# Altium PCB FIT_PM_Dual_Range_AFE.PcbDoc (part 8 of 17)
Units mm, origin at the board's own origin, x right, y up, seen from the top; angles counter-clockwise.
Board outline 259 x 114 mm, 8 copper layers (Top Layer, Mid-Layer 1, Mid-Layer 2, Layer 1, Layer 2, Mid-Layer 3, Mid-Layer 4, Bottom Layer), stack 1.616 mm thick; 963 components, 806 nets, 4757 pads, 2208 vias.
Unrouted connection lines stored in the file: 682.
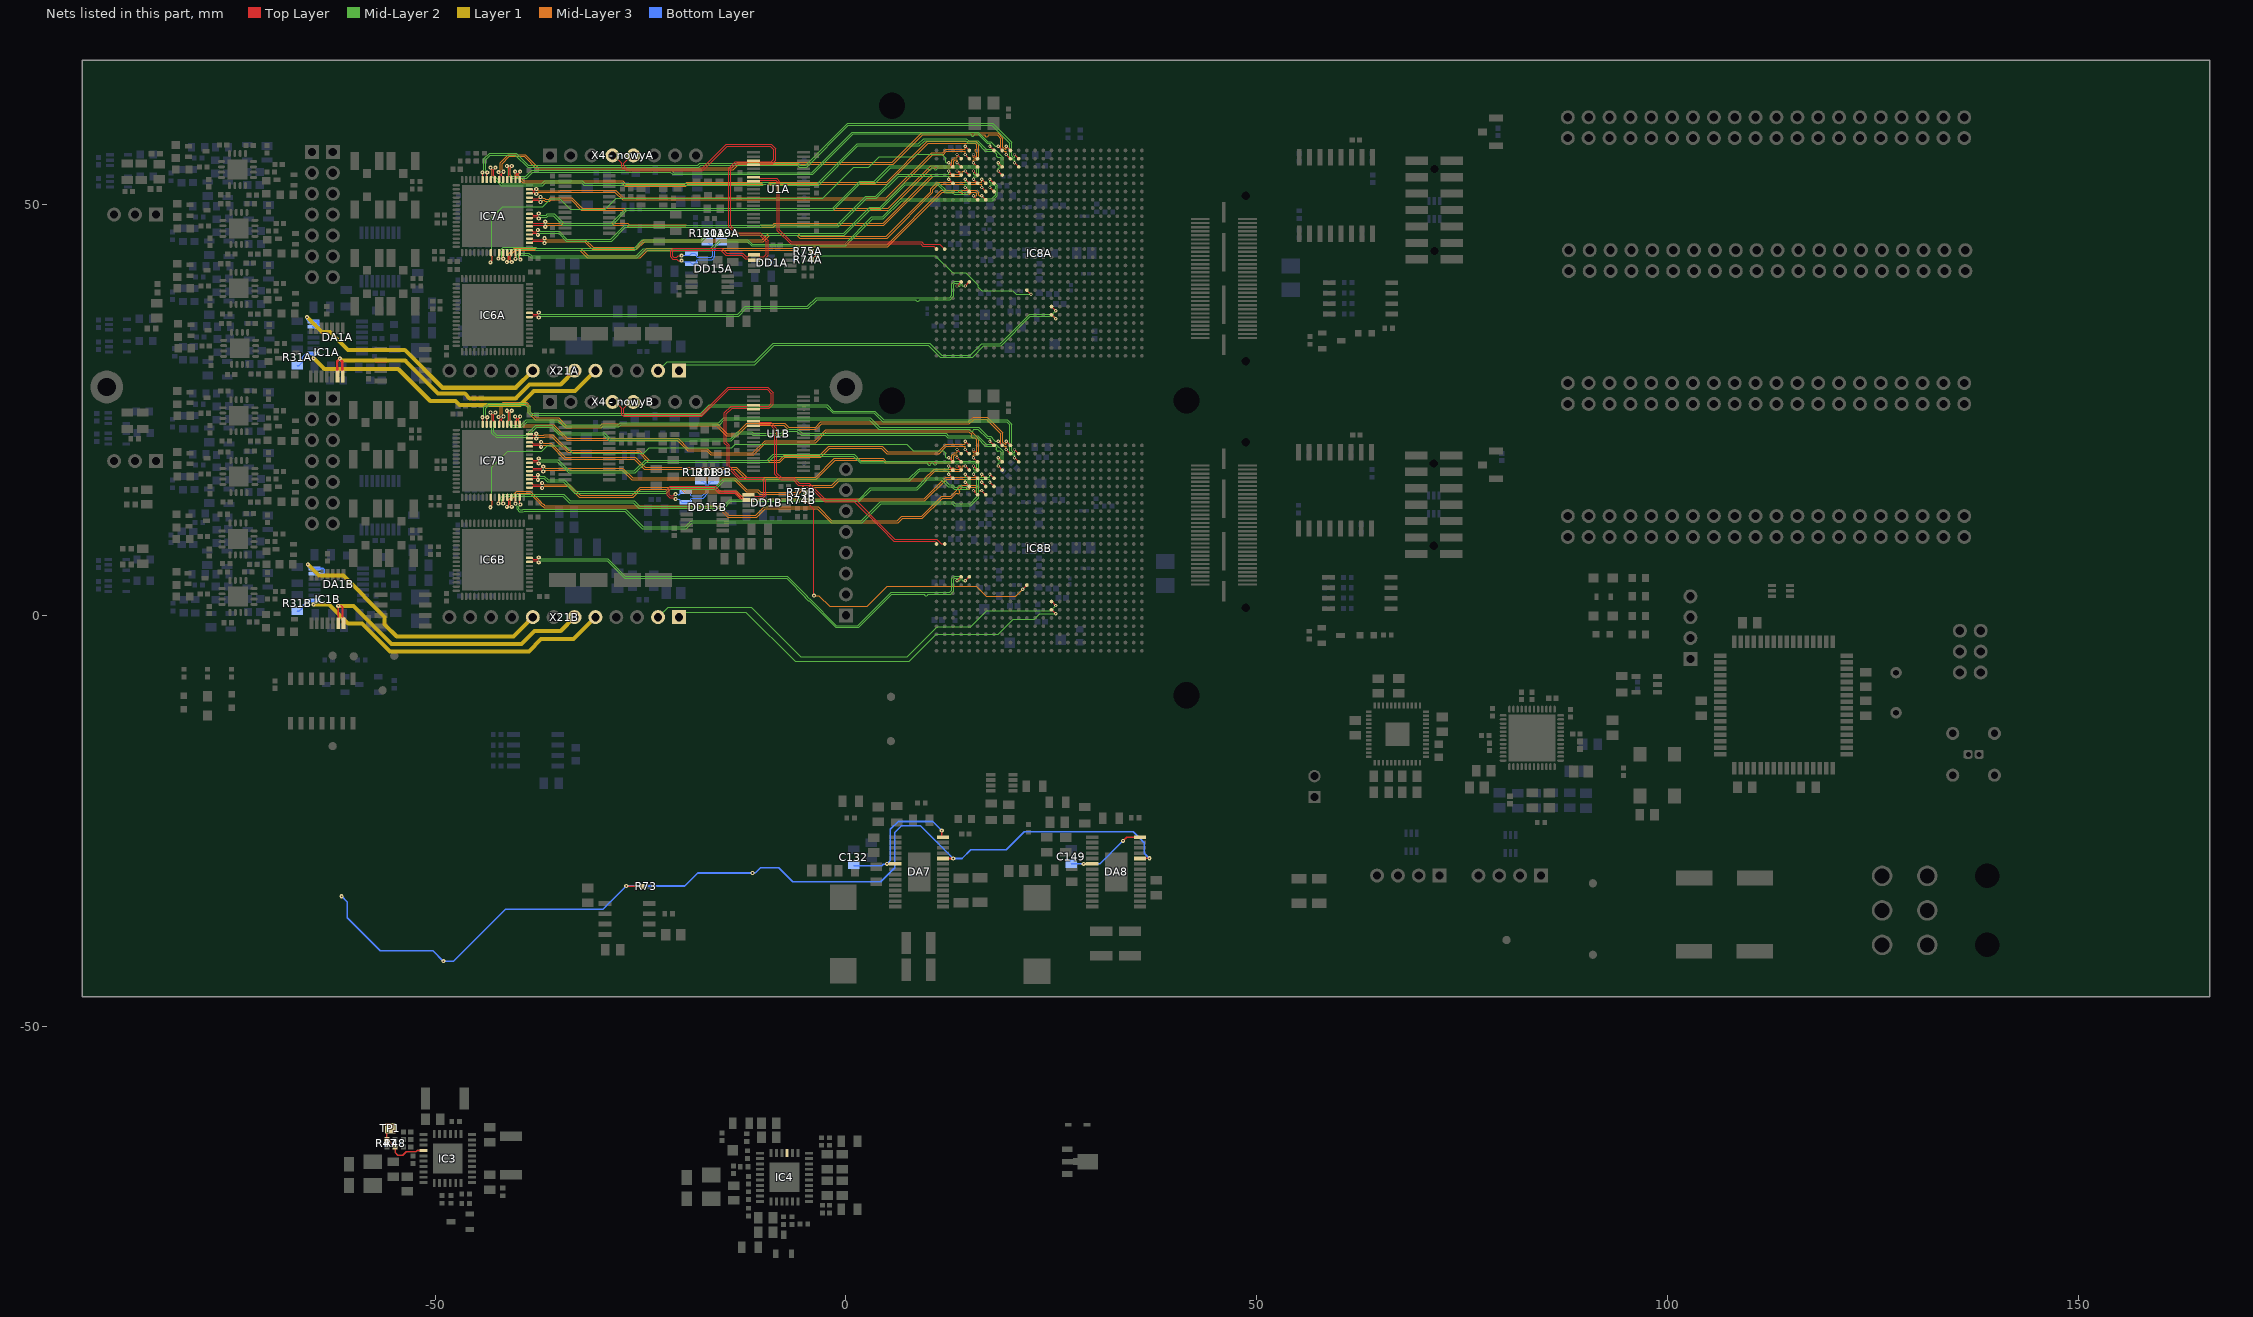
[diagram p10: the nets of this part, all layers, seen from the top]

## Via types
v1: diameter 0.5, hole 0.2, Top Layer to Bottom Layer, tented both sides, 1234 vias
v2: diameter 0.4, hole 0.2, Top Layer to Bottom Layer, tented both sides, 876 vias
v3: diameter 1, hole 0.6, Top Layer to Bottom Layer, tented both sides, 74 vias
v4: diameter 0.8, hole 0.4, Top Layer to Bottom Layer, tented both sides, 15 vias
v5: diameter 0.5, hole 0.2, Top Layer to Bottom Layer, 9 vias

## Nets (pads, with @x,y where several pads share a name; then routed paths per layer and width w, separated by ;. In a path a pad name is that pad's centre, name@x,y a point inside that pad or via, vN(x,y) a via of type N, cw(c..) or ccw(c..) an arc to the next point about the centre after c; other vN are vias at no path point) (continued)
ADCBA_D0_P1: IC7A.40 IC8A.AD24 | length 68.2
  Top Layer w0.1: v1(-43.285,42.96) -43.285,43.045 -43.08,43.25 -43.08,43.579 -43.077,43.582 -43.077,43.697 -43.227,43.847 IC7A.40@-43.227,44.156
  Top Layer w0.145: v2(12.519,55.086) IC8A.AD24@13.019,54.586
  Mid-Layer 2 w0.1: v1(-43.285,42.96) -43.285,43.039 -43.106,43.219 -43.106,48.434 -41.799,49.74 -36.898,49.74 -35.906,50.733 -34.833,50.733 -33.54,49.44 -29.29,49.44 -27.982,50.748 -2.835,50.748 0.95,54.533 2.787,54.533 4.08,55.826 8.32,55.826 8.592,56.098 11.679,56.098 12.139,55.638 12.139,55.144 12.198,55.086 v2(12.519,55.086)
ADCBA_D0_P2: IC7B.40 IC8B.AD24 | length 65.5
  Top Layer w0.1: v1(-43.285,13.16) -43.285,13.245 -43.08,13.45 -43.08,13.779 -43.077,13.782 -43.077,13.897 -43.227,14.047 IC7B.40@-43.227,14.356
  Top Layer w0.145: v2(12.519,19.186) IC8B.AD24@13.019,18.686
  Mid-Layer 2 w0.1: v1(-43.285,13.16) -43.285,13.239 -43.106,13.419 -43.106,18.034 -41.139,20 -37.039,20 -36.369,20.67 -34.17,20.67 -33.24,19.74 -24.641,19.74 -23.97,20.41 -13.899,20.41 -13.47,20.84 7.406,20.84 8.19,20.056 11.821,20.056 12.139,19.738 12.139,19.244 12.198,19.186 v2(12.519,19.186)
ADCBA_D2_N1: IC7A.43 IC8A.AB22 | length 65.6
  Top Layer w0.1: IC7A.43@-41.727,44.156 -41.721,44.149 -41.721,43.417 v1(-41.715,43.411)
  Top Layer w0.145: v2(14.519,53.086) IC8A.AB22@15.019,52.586
  Mid-Layer 2 w0.1: v1(-41.715,43.411) -41.715,43.49 -41.895,43.67 -41.895,44.304 -41.615,44.583 -37.888,44.583 -37.765,44.46 -25.689,44.46 -24.689,45.46 -17.54,45.46 -16.714,46.286 -8.034,46.286 -8.008,46.26 -0.2,46.26 3,49.46 4.26,49.46 7.224,52.424 11.153,52.424 12.141,51.436 12.964,51.436 13.153,51.247 14.827,51.247 15.151,51.571 15.151,52.503 14.948,52.706 14.578,52.706 14.519,52.764 v2(14.519,53.086)
ADCBA_D2_N2: IC7B.43 IC8B.AB22 | length 63.9
  Top Layer w0.1: IC7B.43@-41.727,14.356 -41.721,14.349 -41.721,13.617 v1(-41.715,13.611)
  Top Layer w0.145: v2(14.519,17.186) IC8B.AB22@15.019,16.686
  Mid-Layer 2 w0.1: v1(-41.715,13.611) -41.715,13.69 -41.895,13.87 -41.895,14.105 -41.5,14.5 -34.457,14.5 -33.672,13.715 -25.865,13.715 -25.21,13.06 -14.84,13.06 -14.04,13.86 1.626,13.86 3.052,15.286 8.689,15.286 9.889,16.486 11.615,16.486 12.447,15.653 12.847,15.653 13.153,15.347 14.827,15.347 15.151,15.671 15.151,16.603 14.948,16.806 14.578,16.806 14.519,16.864 v2(14.519,17.186)
ADCBA_D2_P1: IC7A.42 IC8A.AA22 | length 65.5
  Top Layer w0.1: v1(-42.315,43.416) -42.266,43.465 -42.266,44.118 IC7A.42@-42.227,44.156
  Top Layer w0.145: v2(14.519,52.086) IC8A.AA22@15.019,51.586
  Mid-Layer 2 w0.1: v1(-42.315,43.416) -42.315,43.495 -42.135,43.675 -42.135,44.403 -41.715,44.823 -37.789,44.823 -37.666,44.7 -25.789,44.7 -24.789,45.7 -17.639,45.7 -16.814,46.526 -7.935,46.526 -7.909,46.5 -0.299,46.5 2.901,49.7 4.161,49.7 7.125,52.664 11.252,52.664 12.241,51.676 13.064,51.676 13.252,51.487 13.59,51.487 13.64,51.487 13.728,51.576 13.728,51.653 13.817,51.741 13.994,51.741 14.082,51.653 14.082,51.576 14.171,51.487 14.524,51.487 14.728,51.487 14.911,51.67 14.911,52.403 14.849,52.466 14.578,52.466 14.519,52.407 v2(14.519,52.086)
ADCBA_D2_P2: IC7B.42 IC8B.AA22 | length 63.7
  Top Layer w0.1: v1(-42.315,13.616) -42.266,13.665 -42.266,14.318 IC7B.42@-42.227,14.356
  Top Layer w0.145: v2(14.519,16.186) IC8B.AA22@15.019,15.686
  Mid-Layer 2 w0.1: v1(-42.315,13.616) -42.315,13.695 -42.135,13.875 -42.135,14.205 -41.599,14.74 -34.357,14.74 -33.573,13.955 -25.766,13.955 -25.111,13.3 -14.939,13.3 -14.139,14.1 1.527,14.1 2.953,15.526 8.59,15.526 9.79,16.726 11.714,16.726 12.547,15.893 12.946,15.893 13.252,15.587 13.556,15.587 13.606,15.587 13.694,15.676 13.694,15.731 13.783,15.82 13.96,15.82 14.048,15.731 14.048,15.676 14.137,15.587 14.598,15.587 14.728,15.587 14.911,15.77 14.911,16.503 14.849,16.566 14.578,16.566 14.519,16.507 v2(14.519,16.186)
ADCBA_D4_N1: IC7A.45 IC8A.Y21 | length 64.8
  Top Layer w0.1: IC7A.45@-40.727,44.156 -40.727,43.847 -40.877,43.697 -40.877,43.259 -40.677,43.059 v1(-40.677,43)
  Top Layer w0.145: v2(15.519,51.086) IC8A.Y21@16.019,50.586
  Mid-Layer 3 w0.1: v1(-40.677,43) -40.677,43.079 -40.857,43.259 -40.857,43.843 -40.254,44.446 -32.385,44.446 -31.469,43.53 -25.07,43.53 -24.154,44.446 -6.217,44.446 -5.806,44.857 5.093,44.857 11.72,51.484 13.651,51.484 14.055,51.484 14.143,51.395 14.143,51.318 14.232,51.23 14.409,51.23 14.497,51.318 14.497,51.395 14.586,51.484 14.763,51.484 14.851,51.395 14.851,51.355 14.94,51.267 15.117,51.267 15.205,51.355 15.205,51.395 15.294,51.484 15.433,51.484 15.738,51.484 15.899,51.323 15.899,51.144 15.841,51.086 v2(15.519,51.086)
ADCBA_D4_N2: IC7B.45 IC8B.Y21 | length 65.3
  Top Layer w0.1: IC7B.45@-40.727,14.356 -40.727,14.047 -40.877,13.897 -40.877,13.459 -40.677,13.259 v1(-40.677,13.2)
  Top Layer w0.145: v2(15.519,15.186) IC8B.Y21@16.019,14.686
  Mid-Layer 3 w0.1: v1(-40.677,13.2) -40.75,13.273 -40.75,13.374 -40.835,13.459 -40.835,13.972 -39.962,14.845 -38.502,14.845 -37.34,13.683 -37.34,13.635 -36.965,13.26 -36.917,13.26 -36.757,13.1 -15.539,13.1 -14.37,11.93 -10.87,11.93 -9.84,12.96 -3.501,12.96 -1.807,11.266 6.339,11.266 6.883,11.81 9.299,11.81 11.761,14.272 12.833,14.272 13.141,14.581 13.427,14.866 13.552,14.866 13.606,14.812 13.731,14.812 13.857,14.937 13.857,15.062 13.802,15.117 13.802,15.242 13.907,15.347 14.144,15.584 14.229,15.584 14.633,15.584 14.721,15.495 14.721,15.418 14.81,15.33 14.987,15.33 15.075,15.418 15.075,15.495 15.164,15.584 15.277,15.584 15.738,15.584 15.899,15.423 15.899,15.244 15.841,15.186 v2(15.519,15.186)
ADCBA_D4_P1: IC7A.44 IC8A.Y20 | length 65.1
  Top Layer w0.1: v1(-41.277,43) -41.277,43.059 -41.077,43.259 -41.077,43.697 -41.227,43.847 IC7A.44@-41.227,44.156
  Top Layer w0.145: v2(16.519,51.086) IC8A.Y20@17.019,50.586
  Mid-Layer 3 w0.1: v1(-41.277,43) -41.277,43.079 -41.097,43.259 -41.097,43.942 -40.354,44.686 -32.286,44.686 -31.37,43.77 -25.17,43.77 -24.254,44.686 -6.316,44.686 -5.905,45.097 4.993,45.097 11.62,51.724 13.651,51.724 15.837,51.724 16.139,51.422 16.139,51.144 16.198,51.086 v2(16.519,51.086)
ADCBA_D4_P2: IC7B.44 IC8B.Y20 | length 65.6
  Top Layer w0.1: v1(-41.277,13.2) -41.277,13.259 -41.077,13.459 -41.077,13.897 -41.227,14.047 IC7B.44@-41.227,14.356
  Top Layer w0.145: v2(16.519,15.186) IC8B.Y20@17.019,14.686
  Mid-Layer 3 w0.1: v1(-41.277,13.2) -41.277,13.256 -41.075,13.459 -41.075,14.071 -40.061,15.085 -38.403,15.085 -37.1,13.783 -37.1,13.734 -36.866,13.5 -36.817,13.5 -36.657,13.34 -15.44,13.34 -14.27,12.17 -10.969,12.17 -9.939,13.2 -3.401,13.2 -1.707,11.506 6.239,11.506 6.783,12.05 9.199,12.05 11.662,14.512 12.733,14.512 12.971,14.75 14.045,15.824 15.837,15.824 16.139,15.522 16.139,15.244 16.198,15.186 v2(16.519,15.186)
ADCBA_D6_N1: IC7A.47 IC8A.AB19 | length 66.9
  Top Layer w0.1: IC7A.47@-39.727,44.156 -39.689,44.118 -39.689,43.35 v1(-39.633,43.294)
  Top Layer w0.145: v2(17.519,53.086) IC8A.AB19@18.019,52.586
  Mid-Layer 2 w0.1: v1(-39.633,43.294) -39.633,43.377 -39.809,43.552 -39.809,43.801 -39.751,43.859 -38.71,43.859 -38.351,43.5 -25.409,43.5 -24.549,44.36 -16.417,44.36 -15.277,45.5 -12.039,45.5 -11.499,44.96 -0.04,44.96 3.26,48.26 4.56,48.26 6.786,50.486 17.848,50.486 18.441,51.079 18.441,52.325 18.109,52.657 17.578,52.657 17.519,52.716 v2(17.519,53.086)
ADCBA_D6_N2: IC7B.47 IC8B.AB19 | length 64.7
  Top Layer w0.1: IC7B.47@-39.727,14.356 -39.689,14.318 -39.689,13.55 v1(-39.633,13.494)
  Top Layer w0.145: v2(17.519,17.186) IC8B.AB19@18.019,16.686
  Mid-Layer 2 w0.1: v1(-39.633,13.494) -39.633,13.386 -39.8,13.219 -39.8,13 -39.643,12.843 -39.362,12.843 -39.265,12.94 -26.821,12.94 -24.681,10.8 -19.539,10.8 -18.818,11.521 1.882,11.521 4.201,13.84 13.06,13.84 13.3,13.6 15.1,13.6 15.929,14.429 15.929,16.569 16.166,16.806 17.4,16.806 17.48,16.886 17.48,17.147 v2(17.519,17.186)
ADCBA_D6_P1: IC7A.46 IC8A.AA19 | length 66.5
  Top Layer w0.1: IC7A.46@-40.227,44.156 -40.226,44.155 -40.226,43.395 v1(-40.225,43.394)
  Top Layer w0.145: v2(17.519,52.086) IC8A.AA19@18.019,51.586
  Mid-Layer 2 w0.1: v1(-40.225,43.394) -40.225,43.477 -40.049,43.653 -40.049,43.9 -39.85,44.099 -38.611,44.099 -38.252,43.74 -25.508,43.74 -24.648,44.6 -16.517,44.6 -15.377,45.74 -11.94,45.74 -11.4,45.2 -0.139,45.2 3.161,48.5 4.461,48.5 6.686,50.726 17.748,50.726 18.201,51.179 18.201,51.381 18.201,51.431 18.112,51.519 18.035,51.519 17.947,51.608 17.947,51.785 18.035,51.873 18.112,51.873 18.201,51.962 18.201,52.113 18.201,52.226 18.009,52.417 17.6,52.417 17.541,52.359 17.541,52.108 v2(17.519,52.086)
ADCBA_D6_P2: IC7B.46 IC8B.AA19 | length 65.1
  Top Layer w0.1: IC7B.46@-40.227,14.356 -40.226,14.355 -40.226,13.595 v1(-40.225,13.594)
  Top Layer w0.145: v2(17.519,16.186) IC8B.AA19@18.019,15.686
  Mid-Layer 2 w0.1: v1(-40.225,13.594) -40.225,13.486 -40.04,13.301 -40.04,12.901 -39.742,12.603 -39.263,12.603 -39.166,12.7 -26.921,12.7 -24.781,10.56 -19.44,10.56 -18.719,11.281 1.981,11.281 4.3,13.6 12.961,13.6 13.201,13.36 15.199,13.36 16.169,14.33 16.169,16.469 16.266,16.566 17.36,16.566 17.48,16.446 17.48,16.225 v2(17.519,16.186)
ADCBA_D8_N1: IC7A.51 IC8A.AB20 | length 60.5
  Top Layer w0.1: IC7A.51@-38.527,45.856 -38.219,45.856 -38.069,45.706 -36.9,45.706 v1(-36.7,45.906)
  Top Layer w0.145: v2(16.519,53.086) IC8A.AB20@17.019,52.586
  Mid-Layer 3 w0.1: v1(-36.7,45.906) -36.621,45.906 -36.441,45.726 -31.709,45.726 -30.783,44.8 -25.539,44.8 -24.614,45.726 -10.174,45.726 -9.374,46.526 -5.886,46.526 -5.53,46.17 4.909,46.17 10.329,51.59 10.329,51.929 11.106,52.706 16.461,52.706 16.519,52.764 v2(16.519,53.086)
ADCBA_D8_N2: IC7B.51 IC8B.AB20 | length 58.9
  Top Layer w0.1: IC7B.51@-38.527,16.056 -38.219,16.056 -38.069,15.906 -37.856,15.906 -37.854,15.904 -37.241,15.904 -37.041,16.104 v1(-36.982,16.104)
  Top Layer w0.145: v2(16.519,17.186) IC8B.AB20@17.019,16.686
  Mid-Layer 3 w0.1: v1(-36.982,16.104) -36.903,16.104 -36.723,15.924 -35.334,15.924 -35.332,15.926 -33.626,15.926 -32.34,14.64 -25.99,14.64 -25.06,15.57 -19.97,15.57 -19.54,15.14 -13.34,15.14 -12.38,14.18 9.515,14.18 12.16,16.826 16.461,16.826 16.519,16.884 v2(16.519,17.186)
ADCBA_D8_P1: IC7A.50 IC8A.AA20 | length 60.5
  Top Layer w0.1: IC7A.50@-38.527,45.356 -38.219,45.356 -38.069,45.506 -36.9,45.506 v1(-36.7,45.306)
  Top Layer w0.145: v2(16.519,52.086) IC8A.AA20@17.019,51.586
  Mid-Layer 3 w0.1: v1(-36.7,45.306) -36.621,45.306 -36.441,45.486 -31.808,45.486 -30.882,44.56 -25.44,44.56 -24.514,45.486 -10.075,45.486 -9.275,46.286 -5.986,46.286 -5.63,45.93 5.009,45.93 10.569,51.491 10.569,51.83 11.205,52.466 16.461,52.466 16.519,52.407 v2(16.519,52.086)
ADCBA_D8_P2: IC7B.50 IC8B.AA20 | length 58.9
  Top Layer w0.1: IC7B.50@-38.527,15.556 -38.219,15.556 -38.069,15.706 -37.939,15.706 -37.937,15.704 -37.241,15.704 -37.041,15.504 v1(-36.982,15.504)
  Top Layer w0.145: v2(16.519,16.186) IC8B.AA20@17.019,15.686
  Mid-Layer 3 w0.1: v1(-36.982,15.504) -36.903,15.504 -36.723,15.684 -35.235,15.684 -35.233,15.686 -33.725,15.686 -32.439,14.4 -25.891,14.4 -24.96,15.33 -20.07,15.33 -19.639,14.9 -13.439,14.9 -12.48,13.94 9.614,13.94 12.259,16.586 16.441,16.586 16.519,16.507 v2(16.519,16.186)
ADCBA_D10_N1: IC7A.53 IC8A.AC24 | length 56
  Top Layer w0.1: IC7A.53@-38.527,46.856 -38.219,46.856 -38.069,46.706 -37.7,46.706 v1(-37.5,46.906)
  Top Layer w0.145: v2(12.519,54.086) IC8A.AC24@13.019,53.586
  Mid-Layer 2 w0.1: v1(-37.5,46.906) -37.421,46.906 -37.241,46.726 -34.886,46.726 -33.961,45.8 -28.639,45.8 -26.939,47.5 -10.384,47.5 -10.344,47.54 -1.043,47.54 2.414,50.997 3.594,50.997 6.303,53.706 12.461,53.706 12.519,53.764 v2(12.519,54.086)
ADCBA_D10_N2: IC7B.53 IC8B.AC24 | length 54.2
  Top Layer w0.1: IC7B.53@-38.527,17.056 -38.219,17.056 -38.069,16.906 -37.7,16.906 v1(-37.5,17.106)
  Top Layer w0.145: v2(12.519,18.186) IC8B.AC24@13.019,17.686
  Mid-Layer 2 w0.1: v1(-37.5,17.106) -37.421,17.106 -37.241,16.926 -36.702,16.926 -36.27,16.493 -34.301,16.493 -32.907,15.1 -21.963,15.1 -21.463,15.6 -15.939,15.6 -14.939,16.6 7.662,16.6 8.874,17.812 8.96,17.812 8.965,17.817 12.461,17.817 12.519,17.876 v2(12.519,18.186)
ADCBA_D10_P1: IC7A.52 IC8A.AB24 | length 56
  Top Layer w0.1: IC7A.52@-38.527,46.356 -38.219,46.356 -38.069,46.506 -37.7,46.506 v1(-37.5,46.306)
  Top Layer w0.145: v2(12.519,53.086) IC8A.AB24@13.019,52.586
  Mid-Layer 2 w0.1: v1(-37.5,46.306) -37.421,46.306 -37.241,46.486 -34.986,46.486 -34.06,45.56 -28.54,45.56 -26.84,47.26 -10.285,47.26 -10.245,47.3 -0.944,47.3 2.514,50.757 3.694,50.757 6.402,53.466 12.461,53.466 12.519,53.407 v2(12.519,53.086)
ADCBA_D10_P2: IC7B.52 IC8B.AB24 | length 54.2
  Top Layer w0.1: IC7B.52@-38.527,16.556 -38.219,16.556 -38.069,16.706 -37.7,16.706 v1(-37.5,16.506)
  Top Layer w0.145: v2(12.519,17.186) IC8B.AB24@13.019,16.686
  Mid-Layer 2 w0.1: v1(-37.5,16.506) -37.421,16.506 -37.241,16.686 -36.801,16.686 -36.369,16.253 -34.4,16.253 -33.006,14.86 -21.863,14.86 -21.363,15.36 -15.84,15.36 -14.84,16.36 7.761,16.36 8.973,17.572 12.455,17.572 ; 12.461,17.566 12.519,17.507 v2(12.519,17.186)
ADCBA_D12_N1: IC7A.55 IC8A.AC23 | length 56.7
  Top Layer w0.1: IC7A.55@-38.527,47.856 -38.219,47.856 -38.069,47.706 -36.8,47.706 v1(-36.6,47.906)
  Top Layer w0.145: v2(13.519,54.086) IC8A.AC23@14.019,53.586
  Mid-Layer 3 w0.1: v1(-36.6,47.906) -36.521,47.906 -36.341,47.726 -26.586,47.726 -26.4,47.54 -19.485,47.54 -19.445,47.5 -8.934,47.5 -8.708,47.726 4.526,47.726 10.506,53.706 13.821,53.706 13.899,53.784 13.899,54.027 13.841,54.086 v2(13.519,54.086)
ADCBA_D12_N2: IC7B.55 IC8B.AC23 | length 56.6
  Top Layer w0.1: IC7B.55@-38.527,18.056 -38.219,18.056 -38.069,17.906 -37.785,17.906 ; -37.784,17.905 -37.101,17.905 -36.901,18.105 v1(-36.842,18.105)
  Top Layer w0.145: v2(13.519,18.186) IC8B.AC23@14.019,17.686
  Mid-Layer 3 w0.1: v1(-36.842,18.105) -36.763,18.105 -36.583,17.925 -32.113,17.925 ; -32.113,17.926 -27.153,17.926 -25.967,16.74 -13.522,16.74 -12.052,15.27 -10.67,15.27 -10.4,15 -5.9,15 -5.094,15.806 -1.734,15.806 -0.921,16.618 9.552,16.618 10.728,17.795 12.738,17.795 12.788,17.795 12.877,17.884 12.877,17.891 12.965,17.979 13.142,17.979 13.231,17.891 13.231,17.884 13.319,17.795 13.486,17.795 13.841,17.795 13.899,17.854 13.899,18.127 13.841,18.186 v2(13.519,18.186)
ADCBA_D12_P1: IC7A.54 IC8A.AC22 | length 57.1
  Top Layer w0.1: IC7A.54@-38.527,47.356 -38.219,47.356 -38.069,47.506 -36.8,47.506 v1(-36.6,47.306)
  Top Layer w0.145: v2(14.519,54.086) IC8A.AC22@15.019,53.586
  Mid-Layer 3 w0.1: v1(-36.6,47.306) -36.521,47.306 -36.341,47.486 -26.685,47.486 -26.499,47.3 -19.584,47.3 -19.544,47.26 -8.835,47.26 -8.609,47.486 4.625,47.486 10.605,53.466 13.92,53.466 14.139,53.685 14.139,53.991 14.229,54.081 14.514,54.081 v2(14.519,54.086)
ADCBA_D12_P2: IC7B.54 IC8B.AC22 | length 56.8
  Top Layer w0.1: IC7B.54@-38.527,17.556 -38.219,17.556 -38.069,17.706 -37.868,17.706 ; -37.867,17.705 -37.101,17.705 -36.901,17.505 v1(-36.842,17.505)
  Top Layer w0.145: v2(14.519,18.186) IC8B.AC22@15.019,17.686
  Mid-Layer 3 w0.1: v1(-36.842,17.505) -36.763,17.505 -36.583,17.685 -32.014,17.685 ; -32.013,17.686 -27.252,17.686 -26.066,16.5 -13.621,16.5 -12.152,15.03 -10.77,15.03 -10.499,14.76 -5.801,14.76 -4.995,15.566 -1.634,15.566 -0.822,16.378 9.651,16.378 10.828,17.555 13.94,17.555 14.139,17.754 14.139,18.091 14.229,18.181 14.514,18.181 v2(14.519,18.186)
ADCBB_D0_N1: IC7A.61 IC8A.AE23 | length 56.7
  Top Layer w0.1: IC7A.61@-38.527,50.856 -38.219,50.856 -38.069,50.706 -37.925,50.706 -37.912,50.719 -37.437,50.719 -37.237,50.919 v1(-37.178,50.919)
  Top Layer w0.145: v2(13.519,56.086) IC8A.AE23@14.019,55.586
  Mid-Layer 3 w0.1: v1(-37.178,50.919) -37.1,50.919 -36.92,50.739 -36.655,50.739 -36.575,50.659 -36.128,50.659 -35.987,50.8 -33.361,50.8 -32.116,49.555 5.155,49.555 10.336,54.736 12.664,54.736 12.869,54.941 12.869,55.364 13.219,55.714 13.46,55.714 13.518,55.773 13.518,56.075 v2@13.524,56.081
ADCBB_D0_N2: IC7B.61 IC8B.AE23 | length 56.9
  Top Layer w0.1: IC7B.61@-38.527,21.056 -38.219,21.056 -38.069,20.906 -37.2,20.906 -37.1,21.006 v1(-37.1,21.106)
  Top Layer w0.145: v2(13.519,20.186) IC8B.AE23@14.019,19.686
  Mid-Layer 3 w0.1: v1(-37.1,21.106) -37.021,21.106 -36.841,20.926 -35.857,20.926 -34.2,19.269 -25.655,19.269 -24.432,18.046 -13.346,18.046 -12.097,16.797 -3.709,16.797 -1.406,19.1 4.552,19.1 4.866,18.786 12.76,18.786 12.869,18.895 12.869,19.464 13.219,19.814 13.46,19.814 13.518,19.873 13.518,20.175 v2@13.524,20.181
ADCBB_D0_P1: IC7A.60 IC8A.AD23 | length 56.7
  Top Layer w0.1: IC7A.60@-38.527,50.356 -38.219,50.356 -38.069,50.506 -37.842,50.506 -37.829,50.519 -37.437,50.519 -37.237,50.319 v1(-37.178,50.319)
  Top Layer w0.145: v2(13.517,55.103) 13.517,55.095 14.019,54.593 IC8A.AD23@14.019,54.586
  Mid-Layer 3 w0.1: v1(-37.178,50.319) -37.1,50.319 -36.92,50.499 -36.755,50.499 -36.675,50.419 -36.029,50.419 -35.888,50.56 -33.46,50.56 -32.215,49.315 5.255,49.315 10.435,54.496 12.764,54.496 13.109,54.841 13.109,55.265 13.319,55.474 13.46,55.474 13.518,55.416 v2@13.518,55.103
ADCBB_D0_P2: IC7B.60 IC8B.AD23 | length 56.9
  Top Layer w0.1: IC7B.60@-38.527,20.556 -38.219,20.556 -38.069,20.706 -37.2,20.706 -37.1,20.606 v1(-37.1,20.506)
  Top Layer w0.145: v2(13.517,19.203) 13.517,19.195 14.019,18.693 IC8B.AD23@14.019,18.686
  Mid-Layer 3 w0.1: v1(-37.1,20.506) -37.021,20.506 -36.841,20.686 -35.956,20.686 -34.299,19.029 -25.755,19.029 -24.532,17.806 -13.445,17.806 -12.196,16.557 -3.61,16.557 -1.307,18.86 4.452,18.86 4.767,18.546 12.859,18.546 13.109,18.796 13.109,19.365 13.319,19.574 13.46,19.574 13.518,19.516 v2@13.518,19.203
ADCBB_D2_N1: IC7A.63 IC8A.AF22 | length 57.2
  Top Layer w0.1: IC7A.63@-38.527,51.856 -38.23,51.856 -38.066,51.692 -37.959,51.692 -37.759,51.892 v1(-37.7,51.892)
  Top Layer w0.145: v2(14.519,57.086) IC8A.AF22@15.019,56.586
  Mid-Layer 3 w0.1: v1(-37.7,51.892) -37.621,51.892 -37.441,51.712 -34.814,51.712 -34.8,51.726 -28.021,51.726 -27.095,50.8 4.907,50.8 10.433,56.326 11.75,56.326 12.13,56.706 14.461,56.706 14.519,56.764 v2(14.519,57.086)
ADCBB_D2_N2: IC7B.63 IC8B.AF22 | length 57
  Top Layer w0.1: IC7B.63@-38.527,22.056 -38.219,22.056 -38.069,21.906 -37.8,21.906 -37.7,22.006 v1(-37.7,22.106)
  Top Layer w0.145: v2(14.519,21.186) IC8B.AF22@15.019,20.686
  Mid-Layer 3 w0.1: v1(-37.7,22.106) -37.621,22.106 -37.441,21.926 -36.789,21.926 -36.715,22 -35.687,22 -33.783,20.097 -25.149,20.097 -23.952,18.9 -8.139,18.9 -7.539,19.5 -3.173,19.5 -2.073,20.6 4.4,20.6 5.079,19.921 11.245,19.921 12.13,20.806 14.461,20.806 14.519,20.864 v2(14.519,21.186)
ADCBB_D2_P1: IC7A.62 IC8A.AE22 | length 57.1
  Top Layer w0.1: IC7A.62@-38.527,51.356 -38.205,51.356 -38.069,51.492 -37.959,51.492 -37.759,51.292 v1(-37.7,51.292)
  Top Layer w0.145: v2(14.519,56.086) IC8A.AE22@15.019,55.586
  Mid-Layer 3 w0.1: v1(-37.7,51.292) -37.621,51.292 -37.441,51.472 -34.715,51.472 -34.701,51.486 -28.121,51.486 -27.195,50.56 5.007,50.56 10.532,56.086 11.849,56.086 12.229,56.466 14.461,56.466 14.519,56.407 v2(14.519,56.086)
ADCBB_D2_P2: IC7B.62 IC8B.AE22 | length 57
  Top Layer w0.1: IC7B.62@-38.527,21.556 -38.219,21.556 -38.069,21.706 -37.8,21.706 -37.7,21.606 v1(-37.7,21.506)
  Top Layer w0.145: v2(14.519,20.186) IC8B.AE22@15.019,19.686
  Mid-Layer 3 w0.1: v1(-37.7,21.506) -37.621,21.506 -37.441,21.686 -36.69,21.686 -36.615,21.76 -35.786,21.76 -33.883,19.857 -25.248,19.857 -24.052,18.66 -8.04,18.66 -7.44,19.26 -3.074,19.26 -1.974,20.36 4.301,20.36 4.98,19.681 11.344,19.681 12.229,20.566 14.461,20.566 14.519,20.507 v2(14.519,20.186)
ADCBB_D4_N1: IC7A.3 IC8A.AE21 | length 63.8
  Top Layer w0.1: v1(-40.266,54.002) -40.266,53.943 -40.066,53.743 -40.066,53.526 -40.227,53.364 IC7A.3@-40.227,53.056
  Top Layer w0.145: v2(15.519,56.086) IC8A.AE21@16.019,55.586
  Mid-Layer 3 w0.1: v1(-40.266,54.002) -40.266,53.527 -40.079,53.34 -40.029,53.34 -39.332,52.643 -27.299,52.643 -26.914,52.258 -19.5,52.258 -19.258,52.5 5.039,52.5 10.018,57.478 15.721,57.478 15.929,57.27 15.929,57.09 15.929,56.828 15.841,56.74 15.803,56.74 15.714,56.651 15.714,56.474 15.803,56.386 15.841,56.386 15.929,56.297 15.929,56.247 15.929,55.764 15.871,55.706 15.578,55.706 15.519,55.764 v2(15.519,56.086)
ADCBB_D4_N2: IC7B.3 IC8B.AE21 | length 64.5
  Top Layer w0.1: v1(-40.266,24.202) -40.266,24.143 -40.066,23.943 -40.066,23.726 -40.227,23.564 IC7B.3@-40.227,23.256
  Top Layer w0.145: v2(15.519,20.186) IC8B.AE21@16.019,19.686
  Mid-Layer 3 w0.1: v1(-40.266,24.202) -40.266,24.098 -40.07,23.902 -40.07,23.21 -39.807,22.946 -35.664,22.946 -34.018,21.3 -20.539,21.3 -19.27,20.03 -16.97,20.03 -16.469,19.53 -11.233,19.53 -9.736,21.026 -3.674,21.026 -2.374,22.326 14.973,22.326 15.283,22.016 15.283,21.891 15.248,21.855 15.248,21.73 15.373,21.605 15.498,21.605 15.534,21.64 15.659,21.64 15.694,21.605 15.929,21.37 15.929,19.864 15.871,19.806 15.578,19.806 15.519,19.864 v2(15.519,20.186)
ADCBB_D4_P1: IC7A.2 IC8A.AD21 | length 63.9
  Top Layer w0.1: IC7A.2@-39.727,53.056 -39.727,53.376 -39.866,53.514 -39.866,53.743 -39.666,53.943 v1(-39.666,54.002)
  Top Layer w0.145: v2(15.519,55.086) IC8A.AD21@16.019,54.586
  Mid-Layer 3 w0.1: v1(-39.666,54.002) -39.666,53.974 -39.9,53.741 -39.9,53.55 -39.233,52.883 -27.2,52.883 -26.815,52.498 -19.6,52.498 -19.357,52.74 4.94,52.74 9.918,57.718 15.821,57.718 16.169,57.37 16.169,57.09 16.169,55.665 15.97,55.466 15.578,55.466 15.519,55.407 v2(15.519,55.086)
ADCBB_D4_P2: IC7B.2 IC8B.AD21 | length 64.6
  Top Layer w0.1: IC7B.2@-39.727,23.256 -39.727,23.576 -39.866,23.714 -39.866,23.943 -39.666,24.143 v1(-39.666,24.202)
  Top Layer w0.145: v2(15.519,19.186) IC8B.AD21@16.019,18.686
  Mid-Layer 3 w0.1: v1(-39.666,24.202) -39.666,24.093 -39.83,23.929 -39.83,23.309 -39.708,23.186 -35.565,23.186 -33.919,21.54 -20.44,21.54 -19.17,20.27 -16.87,20.27 -16.37,19.77 -11.332,19.77 -9.836,21.266 -3.773,21.266 -2.473,22.566 15.072,22.566 16.169,21.47 16.169,19.765 15.97,19.566 15.578,19.566 15.519,19.507 v2(15.519,19.186)
ADCBB_D6_N1: IC7A.5 IC8A.AF19 | length 66.1
  Top Layer w0.1: v1(-41.277,54.7) -41.077,54.5 -41.077,53.761 -41.077,53.514 -41.227,53.364 IC7A.5@-41.227,53.056
  Top Layer w0.145: v2(17.519,57.086) IC8A.AF19@18.019,56.586
  Mid-Layer 2 w0.1: v1(-41.277,54.7) -41.277,54.621 -41.097,54.441 -41.097,53.553 -40.76,53.215 -38.885,53.215 -38.153,53.947 -21.363,53.947 -21.076,53.66 -4.046,53.66 0.885,58.59 15.037,58.59 15.144,58.59 15.233,58.502 15.233,58.425 15.321,58.336 15.498,58.336 15.587,58.425 15.587,58.502 15.675,58.59 15.725,58.59 16.015,58.59 17.169,57.436 17.528,57.436 17.586,57.377 17.586,57.294 17.577,57.285 17.577,57.143 v2(17.519,57.086)
ADCBB_D6_N2: IC7B.5 IC8B.AF19 | length 65.5
  Top Layer w0.1: v1(-41.277,24.9) -41.077,24.7 -41.077,23.961 -41.077,23.714 -41.227,23.564 IC7B.5@-41.227,23.256
  Top Layer w0.145: v2(17.519,21.186) IC8B.AF19@18.019,20.686
  Mid-Layer 2 w0.1: v1(-41.277,24.9) -41.277,24.821 -41.097,24.641 -41.097,23.296 -40.7,22.899 -39.495,22.899 -38.802,23.593 -35.015,23.593 -34.352,22.93 -27.67,22.93 -27.383,23.217 -15.383,23.217 -14.805,23.795 -10.09,23.795 -10.085,23.8 2.842,23.8 3.995,22.648 14.64,22.648 15.044,22.648 15.132,22.559 15.132,22.482 15.221,22.394 15.398,22.394 15.486,22.482 15.486,22.559 15.575,22.648 15.929,22.648 16.057,22.648 17.169,21.536 17.528,21.536 17.586,21.477 17.586,21.394 17.577,21.385 17.577,21.243 v2(17.519,21.186)
ADCBB_D6_P1: IC7A.4 IC8A.AF18 | length 66.3
  Top Layer w0.1: IC7A.4@-40.727,53.056 -40.727,53.364 -40.877,53.514 -40.877,53.678 -40.877,54.5 v1(-40.677,54.7)
  Top Layer w0.145: v2(18.519,57.086) IC8A.AF18@19.019,56.586
  Mid-Layer 2 w0.1: v1(-40.677,54.7) -40.677,54.621 -40.857,54.441 -40.857,53.652 -40.661,53.455 -38.984,53.455 -38.253,54.187 -21.263,54.187 -20.977,53.9 -4.145,53.9 0.785,58.83 15.037,58.83 16.114,58.83 17.269,57.676 17.627,57.676 18.001,57.302 18.001,57.283 18.198,57.086 v2(18.519,57.086)
ADCBB_D6_P2: IC7B.4 IC8B.AF18 | length 65.7
  Top Layer w0.1: IC7B.4@-40.727,23.256 -40.727,23.564 -40.877,23.714 -40.877,23.878 -40.877,24.7 v1(-40.677,24.9)
  Top Layer w0.145: v2(18.519,21.186) IC8B.AF18@19.019,20.686
  Mid-Layer 2 w0.1: v1(-40.677,24.9) -40.677,24.821 -40.857,24.641 -40.857,23.396 -40.601,23.139 -39.595,23.139 -38.901,23.833 -34.915,23.833 -34.253,23.17 -27.769,23.17 -27.483,23.457 -15.483,23.457 -14.905,24.035 -10.189,24.035 -10.184,24.04 2.942,24.04 4.094,22.888 16.157,22.888 17.269,21.776 17.627,21.776 18.001,21.402 18.001,21.383 18.198,21.186 v2(18.519,21.186)
ADCBB_D8_N1: IC7A.7 IC8A.AF17 | length 69.3
  Top Layer w0.1: v1(-42.277,53.949) -42.277,53.898 -42.069,53.69 -42.069,53.523 -42.227,53.364 IC7A.7@-42.227,53.056
  Top Layer w0.145: v2(19.519,57.086) IC8A.AF17@20.019,56.586
  Mid-Layer 3 w0.1: v1(-42.277,53.949) -42.277,54.029 -42.098,54.208 -42.098,54.483 -42.095,54.486 -42.095,55.077 -41.081,56.091 -39.057,56.091 -37.449,54.484 -27.551,54.484 -13.816,54.484 -13.16,55.14 5.64,55.14 9.223,58.723 18.486,58.723 19.109,58.1 19.109,56.974 19.378,56.706 19.461,56.706 19.519,56.764 v2(19.519,57.086)
ADCBB_D8_N2: IC7B.7 IC8B.AF17 | length 70.9
  Top Layer w0.1: v1(-42.277,24.149) -42.277,24.098 -42.069,23.89 -42.069,23.723 -42.227,23.564 IC7B.7@-42.227,23.256
  Top Layer w0.145: v2(19.519,21.186) IC8B.AF17@20.019,20.686
  Mid-Layer 3 w0.1: v1(-42.277,24.149) -42.277,24.229 -42.098,24.408 -42.098,25.542 -41.699,25.94 -38.874,25.94 -38.41,25.477 -38.41,24.722 -37.71,24.021 -34.983,24.021 -34.031,23.07 -29.916,23.07 -29.654,23.331 -15.692,23.331 -14.463,22.103 -13.35,22.103 -12.052,23.4 -7.483,23.4 -6.983,22.9 -3.705,22.9 -3.065,23.54 14.889,23.54 15.485,24.136 17.173,24.136 19.109,22.2 19.109,21.074 19.378,20.806 19.461,20.806 19.519,20.864 v2(19.519,21.186)
ADCBB_D8_P1: IC7A.6 IC8A.AE17 | length 69.1
  Top Layer w0.1: IC7A.6@-41.727,53.056 -41.727,53.373 -41.869,53.514 -41.869,53.738 -41.679,53.929 v1(-41.679,53.997)
  Top Layer w0.145: v2(19.519,56.086) IC8A.AE17@20.019,55.586
  Mid-Layer 3 w0.1: v1(-41.679,53.997) -41.679,54.077 -41.858,54.256 -41.858,54.384 -41.855,54.386 -41.855,54.978 -40.982,55.851 -39.156,55.851 -37.549,54.244 -27.451,54.244 -13.717,54.244 -13.061,54.9 5.739,54.9 9.323,58.483 16.461,58.483 16.865,58.483 16.954,58.395 16.954,58.343 17.042,58.254 17.219,58.254 17.308,58.343 17.308,58.395 17.396,58.483 17.949,58.483 18.386,58.483 18.869,58.001 18.869,56.875 19.278,56.466 19.461,56.466 19.519,56.407 v2(19.519,56.086)
ADCBB_D8_P2: IC7B.6 IC8B.AE17 | length 70.5
  Top Layer w0.1: IC7B.6@-41.727,23.256 -41.727,23.573 -41.869,23.714 -41.869,23.938 -41.679,24.129 v1(-41.679,24.197)
  Top Layer w0.145: v2(19.519,20.186) IC8B.AE17@20.019,19.686
  Mid-Layer 3 w0.1: v1(-41.679,24.197) -41.679,24.277 -41.858,24.456 -41.858,25.442 -41.6,25.7 -38.973,25.7 -38.65,25.377 -38.65,24.622 -37.809,23.781 -35.082,23.781 -34.131,22.83 -29.817,22.83 -29.555,23.091 -15.791,23.091 -14.563,21.863 -13.25,21.863 -11.953,23.16 -7.582,23.16 -7.082,22.66 -3.606,22.66 -2.966,23.3 14.989,23.3 15.584,23.896 17.074,23.896 18.869,22.101 18.869,20.975 19.278,20.566 19.461,20.566 19.519,20.507 v2(19.519,20.186)
ADCBB_D10_N1: IC7A.9 IC8A.AD18 | length 71.3
  Top Layer w0.1: v1(-43.277,54.496) -43.277,54.438 -43.077,54.238 -43.077,53.514 -43.227,53.364 IC7A.9@-43.227,53.056
  Top Layer w0.145: v2(18.519,55.086) IC8A.AD18@19.019,54.586
  Mid-Layer 2 w0.1: v1(-43.277,54.496) -43.277,54.418 -43.097,54.238 -43.097,53.442 -41.948,52.292 -36.905,52.292 -36.555,52.643 -32.19,52.643 -31.9,52.352 -10.113,52.352 -9.966,52.5 -9.634,52.5 -9.487,52.352 -3.331,52.352 1.461,57.144 8.917,57.144 9.564,57.791 14.554,57.791 14.84,57.505 15.95,57.505 16.962,56.493 18.028,56.493 18.192,56.329 18.375,56.146 18.375,56.021 18.339,55.985 18.339,55.86 18.464,55.735 18.59,55.735 18.625,55.771 18.751,55.771 18.786,55.735 18.9,55.621 18.9,54.807 18.799,54.706 18.578,54.706 18.519,54.764 v2(18.519,55.086)
ADCBB_D10_N2: IC7B.9 IC8B.AD18 | length 72
  Top Layer w0.1: v1(-43.277,24.696) -43.277,24.638 -43.077,24.438 -43.077,23.714 -43.227,23.564 IC7B.9@-43.227,23.256
  Top Layer w0.145: v2(18.519,19.186) IC8B.AD18@19.019,18.686
  Mid-Layer 2 w0.1: v1(-43.277,24.696) -43.277,24.618 -43.097,24.438 -43.097,22.158 -42.599,21.66 -38.901,21.66 -37.661,22.9 -35.898,22.9 -34.978,21.98 -29.519,21.98 -28.799,21.26 -13.94,21.26 -13.1,22.1 -11.539,22.1 -11.369,21.93 -7.77,21.93 -7.27,22.43 -5.97,22.43 -5.439,21.9 12.083,21.9 12.378,21.605 15.95,21.605 16.962,20.593 18.16,20.593 18.185,20.568 18.341,20.412 18.341,20.287 18.305,20.252 18.305,20.126 18.43,20.001 18.555,20.001 18.591,20.037 18.716,20.037 18.751,20.002 18.9,19.853 18.9,18.907 18.799,18.806 18.578,18.806 18.519,18.864 v2(18.519,19.186)
ADCBB_D10_P1: IC7A.8 IC8A.AC18 | length 71.4
  Top Layer w0.1: IC7A.8@-42.727,53.056 -42.727,53.364 -42.877,53.514 -42.877,54.238 -42.677,54.438 v1(-42.677,54.496)
  Top Layer w0.145: v2(18.519,54.086) IC8A.AC18@19.019,53.586
  Mid-Layer 2 w0.1: v1(-42.677,54.496) -42.677,54.418 -42.857,54.238 -42.857,53.541 -41.848,52.532 -37.005,52.532 -36.654,52.883 -32.091,52.883 -31.8,52.592 -10.213,52.592 -10.065,52.74 -9.535,52.74 -9.387,52.592 -3.43,52.592 1.361,57.384 8.817,57.384 9.465,58.031 14.653,58.031 14.939,57.745 16.049,57.745 17.062,56.733 18.128,56.733 18.362,56.499 19.14,55.72 19.14,54.707 18.899,54.466 18.578,54.466 18.519,54.407 v2(18.519,54.086)
ADCBB_D10_P2: IC7B.8 IC8B.AC18 | length 72.1
  Top Layer w0.1: IC7B.8@-42.727,23.256 -42.727,23.564 -42.877,23.714 -42.877,24.438 -42.677,24.638 v1(-42.677,24.696)
  Top Layer w0.145: v2(18.519,18.186) IC8B.AC18@19.019,17.686
  Mid-Layer 2 w0.1: v1(-42.677,24.696) -42.677,24.618 -42.857,24.438 -42.857,22.257 -42.5,21.9 -39,21.9 -37.76,23.14 -35.798,23.14 -34.879,22.22 -29.42,22.22 -28.7,21.5 -14.039,21.5 -13.199,22.34 -11.44,22.34 -11.27,22.17 -7.87,22.17 -7.369,22.67 -5.87,22.67 -5.34,22.14 12.182,22.14 12.477,21.845 16.049,21.845 17.062,20.833 18.26,20.833 19.14,19.952 19.14,18.807 18.899,18.566 18.578,18.566 18.519,18.507 v2(18.519,18.186)
ADCBB_D12_N1: IC7A.11 IC8A.AE16 | length 74.2
  Top Layer w0.1: v1(-44.26,53.914) -44.21,53.864 -44.21,53.448 -44.227,53.43 IC7A.11@-44.227,53.056
  Top Layer w0.145: v2(20.519,56.086) IC8A.AE16@21.019,55.586
  Mid-Layer 2 w0.1: v1(-44.26,53.914) -44.26,53.992 -44.08,54.172 -44.08,55.57 -43.384,56.266 -40.127,56.266 -38.661,54.8 -18.026,54.8 -17.786,55.04 -5.824,55.04 -5.584,54.8 -4.883,54.8 0.207,59.89 17.869,59.89 20.169,57.59 20.169,55.914 20.378,55.706 20.461,55.706 20.519,55.764 v2(20.519,56.086)
ADCBB_D12_N2: IC7B.11 IC8B.AE16 | length 73.7
  Top Layer w0.1: v1(-44.26,24.114) -44.21,24.064 -44.21,23.648 -44.227,23.63 IC7B.11@-44.227,23.256
  Top Layer w0.145: v2(20.519,20.186) IC8B.AE16@21.019,19.686
  Mid-Layer 2 w0.1: v1(-44.26,24.114) -44.26,24.192 -44.08,24.372 -44.08,25.334 -43.573,25.84 -38.94,25.84 -38.46,25.36 -38.46,24.76 -38.29,24.59 -17.675,24.59 -16.626,25.64 -2.301,25.64 -1.53,24.87 3.507,24.87 4.577,23.8 19.645,23.8 20.169,23.276 20.169,20.014 20.378,19.806 20.461,19.806 20.519,19.864 v2(20.519,20.186)
ADCBB_D12_P1: IC7A.10 IC8A.AD16 | length 73.8
  Top Layer w0.1: IC7A.10@-43.727,53.056 -43.71,53.074 -43.71,53.864 v1(-43.66,53.914)
  Top Layer w0.145: v2(20.519,55.086) IC8A.AD16@21.019,54.586
  Mid-Layer 2 w0.1: v1(-43.66,53.914) -43.66,53.992 -43.84,54.172 -43.84,55.47 -43.284,56.026 -40.226,56.026 -38.761,54.56 -17.926,54.56 -17.686,54.8 -5.924,54.8 -5.684,54.56 -4.784,54.56 0.306,59.65 17.769,59.65 19.929,57.49 19.929,55.815 20.278,55.466 20.461,55.466 20.519,55.407 v2(20.519,55.086)
ADCBB_D12_P2: IC7B.10 IC8B.AD16 | length 73.3
  Top Layer w0.1: IC7B.10@-43.727,23.256 -43.71,23.274 -43.71,24.064 v1(-43.66,24.114)
  Top Layer w0.145: v2(20.519,19.186) IC8B.AD16@21.019,18.686
  Mid-Layer 2 w0.1: v1(-43.66,24.114) -43.66,24.192 -43.84,24.372 -43.84,25.234 -43.474,25.6 -39.039,25.6 -38.7,25.261 -38.7,24.661 -38.39,24.35 -17.576,24.35 -16.526,25.4 -2.4,25.4 -1.63,24.63 3.408,24.63 4.478,23.56 19.546,23.56 19.929,23.176 19.929,19.915 20.278,19.566 20.461,19.566 20.519,19.507 v2(20.519,19.186)
AFE_I2C_SCL1: IC8A.G12 X21A.2 | length 53.3
  Top Layer w0.145: IC8A.G12@25.019,37.586 v2(25.519,37.086)
  Mid-Layer 2 w0.1: X21A.2@-22.88,29.78 -21.777,30.883 -11.117,30.883 -8.869,33.131 10.214,33.131 11.659,31.686 15.119,31.686 16.521,33.087 18.755,33.087 22.341,36.673 25.106,36.673 v2(25.519,37.086)
AFE_I2C_SCL2: IC8B.G12 X21B.2 | length 54.7
  Top Layer w0.145: IC8B.G12@25.019,1.686 v2(25.519,1.186)
  Mid-Layer 2 w0.1: X21B.2@-22.88,-0.22 -21.66,1 -11.5,1 -5.482,-5.018 7.466,-5.018 11.08,-1.404 15.204,-1.404 17.144,0.536 24.869,0.536 v2(25.519,1.186)
AFE_I2C_SDA1: IC8A.F12 X21A.1 | length 50.6
  Top Layer w0.145: IC8A.F12@25.019,36.586 v2(25.519,36.086)
  Mid-Layer 2 w0.1: X21A.1@-20.34,29.78 -19.616,30.504 -11.096,30.504 -8.743,32.857 10.007,32.857 11.462,31.402 15.34,31.402 15.374,31.436 15.411,31.436 16.775,32.8 18.874,32.8 22.46,36.386 25.219,36.386 v2(25.519,36.086)
AFE_I2C_SDA2: IC8B.F12 X21B.1 | length 51.7
  Top Layer w0.145: IC8B.F12@25.019,0.686 v2(25.519,0.186)
  Mid-Layer 2 w0.1: X21B.1@-20.34,-0.22 -19.72,0.4 -12.2,0.4 -6.186,-5.614 7.713,-5.614 11.013,-2.314 18.505,-2.314 20.355,-0.464 22.914,-0.464 23.564,0.186 v2(25.519,0.186)
BUCK_SYNC: DA7.10 DA8.10 R73.2 | length 123.2
  Top Layer w0.2: v1(-26.741,-32.941) -26.693,-32.989 R73.2@-24.895,-32.989 ; DA7.10@11.654,-29.599 DA7.10@11.804,-29.599 v1(13.054,-29.599) ; DA8.10@35.644,-29.599 35.66,-29.583 36.91,-29.583 v1(36.926,-29.568)
  Bottom Layer w0.2: v1(-61.391,-34.191) -60.697,-34.884 -60.697,-36.824 -56.697,-40.824 -50.271,-40.824 v1(-49.004,-42.091) -47.764,-42.091 -41.469,-35.795 -29.596,-35.795 v1(-26.741,-32.941) -19.619,-32.941 -18.039,-31.361 v1(-11.381,-31.361) -11.372,-31.352 -11.026,-31.352 -10.397,-30.724 -8.197,-30.724 -6.497,-32.424 4.223,-32.424 5.935,-30.712 5.935,-26.426 6.771,-25.59 9.045,-25.59 v1(13.054,-29.599) 14.128,-29.599 15.203,-28.524 19.503,-28.524 21.703,-26.324 23.518,-26.324 31.799,-26.324 34.97,-26.324 36.311,-27.665 36.311,-28.953 v1(36.926,-29.568)
BUFFER_OFFSETA: IC1A.13 IC1A.14 X21A.6 | length 36.6
  Top Layer w0.3: IC1A.13@-61.9,29.05 -61.9,30.95 v1(-61.6,31.25) -61.6,31.196 -61.325,30.921 -61.325,29.125 IC1A.14@-61.25,29.05
  Layer 1 w0.5: v1(-61.6,31.25) -61.35,31 -53.651,31 -49.651,27 -46.4,27 -45.8,26.4 -40.2,26.4 -38.5,28.1 -34.72,28.1 X21A.6@-33.04,29.78
BUFFER_OFFSETB: IC1B.13 IC1B.14 X21B.6 | length 36.8
  Top Layer w0.2: IC1B.13@-61.804,-0.963 -61.802,-0.96 -61.802,1.148 v1(-61.8,1.15) -61.397,1.15 -61.279,1.032 -61.279,-0.838 IC1B.14@-61.154,-0.963
  Layer 1 w0.5: v1(-61.8,1.15) -59.95,1.15 -55.3,-3.5 -39.5,-3.5 -37.9,-1.9 -34.72,-1.9 X21B.6@-33.04,-0.22
Calibration_N1: IC8A.P26 U1A.8 | length 29.3
  Top Layer w0.145: U1A.8@-11.25,52.846 -10.6,52.846 -10.472,52.973 -8.557,52.973 -8.345,52.761 -8.345,46.816 -6.733,45.204 9.092,45.204 9.365,44.93 10.675,44.93 IC8A.P26@11.019,44.586
Calibration_N2: IC8B.P26 U1B.8 | length 31.6
  Top Layer w0.145: U1B.8@-11.25,23.1 -10.6,23.1 -10.466,23.234 -9.575,23.234 -9.266,23.234 -8.645,22.613 -8.645,17.199 -7.929,16.483 -6.429,16.483 -5.801,15.855 -4.601,15.855 -2.602,13.856 1.018,13.856 4.269,10.605 5.831,9.043 10.871,9.043 10.961,8.954 10.961,8.744 IC8B.P26@11.019,8.686
Calibration_P1: IC8A.P25 U1A.7 | length 30.4
  Top Layer w0.145: U1A.7@-11.25,53.346 -10.6,53.346 -10.472,53.218 -8.456,53.218 -8.1,52.862 -8.1,46.917 -6.632,45.449 9.193,45.449 9.454,45.188 11.417,45.188 IC8A.P25@12.019,44.586
Calibration_P2: IC8B.P25 U1B.7 | length 32.6
  Top Layer w0.145: U1B.7@-11.25,23.6 -10.6,23.6 -10.479,23.479 -9.676,23.479 -9.164,23.479 -8.4,22.715 -8.4,17.3 -7.828,16.728 -6.328,16.728 -5.7,16.1 -4.5,16.1 -2.501,14.101 1.12,14.101 4.37,10.85 5.932,9.288 11.029,9.288 11.588,8.729 11.976,8.729 IC8B.P25@12.019,8.686
CFD_CMP_OFFSETA: DA1A.13 DA1A.14 X21A.8 | length 34.8
  Layer 1 w0.5: v1(-65.6,36.3) -63.8,34.5 -62.8,34.5 -60.6,32.3 -53.7,32.3 -49.1,27.7 -40.2,27.7 X21A.8@-38.12,29.78
  Bottom Layer w0.3: v1(-65.6,36.3) -65.6,36.055 -65.319,35.774 DA1A.14@-64.819,35.774 -64.319,35.774 -64.244,35.699 -64.244,35.199 -64.319,35.124 DA1A.13@-64.819,35.124
CFD_CMP_OFFSETB: DA1B.13 DA1B.14 X21B.8 | length 36.5
  Layer 1 w0.5: v1(-65.5,6.2) -64.132,4.832 -61.184,4.832 -56.155,-0.196 -56.155,-1.093 -54.68,-2.569 -40.469,-2.569 X21B.8@-38.12,-0.22
  Bottom Layer w0.2: v1(-65.5,6.2) -65.5,5.993 -65.213,5.706 DA1B.14@-64.713,5.706 -64.707,5.7 -63.617,5.7 -63.5,5.583 -63.5,5.2 -63.644,5.056 DA1B.13@-64.713,5.056
CFD_OFFSETA: DA1A.8 R31A.2 X21A.5 | length 41.9
  Layer 1 w0.5: v1(-64.8,31.3) -63.5,30 -54.5,30 -50.6,26.1 -47.549,26.1 -47.049,25.6 -39.7,25.6 -38,27.3 -32.98,27.3 X21A.5@-30.5,29.78
  Bottom Layer w0.2: R31A.2@-66.8,30.4 -66.579,30.4 -66.204,30.775 -66.204,31.394 -65.727,31.871 -64.822,31.871 DA1A.8@-64.819,31.874 -64.8,31.855 v1(-64.8,31.3)
CFD_OFFSETB: DA1B.8 R31B.2 X21B.5 | length 41.7
  Layer 1 w0.5: v1(-64.8,1.3) -62.9,1.3 -60.6,-1 -58.9,-1 -55.5,-4.4 -38.6,-4.4 -37.1,-2.9 -33.18,-2.9 X21B.5@-30.5,-0.22
  Bottom Layer w0.2: R31B.2@-66.8,0.5 -66.575,0.5 -66.2,0.875 -66.2,1.1 -65.591,1.709 -64.81,1.709 DA1B.8@-64.713,1.806 -64.8,1.719 v1(-64.8,1.3)
CFD_OUT1: IC8A.J15 R74A.2 R75A.2 | length 30.3
  Top Layer w0.1: R74A.2@-4.16,43.3 -4.16,43.32 -3.92,43.56 -3.9,43.56 -3.713,43.747 -3.711,43.747 -3.66,43.798 -3.66,43.85 -3.711,43.901 -3.761,43.901 -3.9,44.04 -3.92,44.04 -4.16,44.28 R75A.2@-4.16,44.3 ; IC8A.J15@22.019,39.586 v2(22.519,39.086)
  Mid-Layer 2 w0.1: v1(-3.526,43.824) -3.502,43.8 10.891,43.8 13.01,41.68 14.606,41.68 16.117,40.17 16.117,39.906 16.537,39.486 20.328,39.486 20.728,39.086 v2(22.519,39.086)
CFD_OUT2: IC8B.J15 R74B.2 R75B.2 | length 41.6
  Top Layer w0.1: R74B.2@-4.96,14 -4.96,13.98 -3.9,12.92 v1(-3.9,2.4)
  Top Layer w0.145: v2(21.519,3.186) IC8B.J15@22.019,3.686
  Top Layer w0.3: R74B.2@-4.96,14 R75B.2@-4.96,15
  Mid-Layer 3 w0.1: v1(-3.9,2.4) -3.3,2.4 -1.991,1.091 2.571,1.091 5.039,3.558 15.85,3.558 17.065,2.343 20.676,2.343 v2(21.519,3.186)
CFD_OUTA_N: "X4 - nowyA.5" DD1A.2 DD15A.4 R120A.1 U1A.4 | length 64.2
  Top Layer w0.145: -25.88,55.98 -26.048,55.98 -27.027,55 -27.027,54.729 -26.672,54.373 -17.527,54.373 -14.555,57.345 -9.099,57.345 -8.555,56.801 -8.555,55.399 -8.984,54.969 -9.853,54.969 -10.477,54.969 -10.672,54.774 U1A.4@-11.25,54.774 ; v1@-19.915,43.778 v1(-20,43.778) -20.422,43.778 -20.6,43.6 -20.958,43.6 -21.084,43.726 -21.084,44.324 -20.953,44.455 -15.222,44.455 -14.622,43.855 -12.696,43.855 -12.269,43.428 -11.927,43.428 -11.725,43.225 DD1A.2@-11.2,43.225 -10.675,43.225 -10.473,43.428 -9.886,43.428 -9.455,43.858 -9.455,45.601 -10.454,46.6 -13.2,46.6 -14,47.4 -14,51.002 -14.023,51.025 -14.023,51.375 -14,51.398 -14,54.335 -13.352,54.984 -12.714,54.984 -12.038,54.984 -11.9,54.846 U1A.4@-11.25,54.846
  Bottom Layer w0.145: v1(-20,43.778) -19.935,43.843 -19.027,43.843 DD15A.4@-18.8,44.07 -18.405,44.07 -18.177,43.843 -18.177,43.642 -18.092,43.557 -16.4,43.557 -16.2,43.757 -16.2,44.501 -16.172,44.529 -16.172,45.013 -16.257,45.098 -16.498,45.098 R120A.1@-16.9,45.5
CFD_OUTA_P: "X4 - nowyA.4" DD1A.1 DD15A.3 R119A.1 U1A.3 | length 64.5
  Top Layer w0.145: -28.42,55.98 -28.252,55.98 -27.272,55 -27.272,54.628 -26.773,54.128 -17.425,54.128 -14.454,57.1 -9.2,57.1 -8.8,56.7 -8.8,55.5 -9.086,55.214 -9.752,55.214 -10.468,55.214 U1A.3@-10.673,55.419 ; v1@-19.915,43.178 v1(-20,43.178) -20.423,43.178 -20.6,43.355 -21.059,43.355 -21.329,43.625 -21.329,44.425 -21.055,44.7 -15.121,44.7 -14.521,44.1 -12.595,44.1 -12.168,43.673 -11.927,43.673 -11.725,43.875 DD1A.1@-11.2,43.875 -10.675,43.875 -10.473,43.673 -9.987,43.673 -9.7,43.96 -9.7,45.5 -10.555,46.355 -13.301,46.355 -14.245,47.299 -14.245,50.901 -14.268,50.924 -14.268,51.476 -14.245,51.499 -14.245,54.437 -13.453,55.229 -12.613,55.229 -12.017,55.229 -11.9,55.346 U1A.3@-11.25,55.346
  Bottom Layer w0.145: v1(-20,43.178) -19.904,43.178 -19.754,43.027 -19.027,43.027 DD15A.3@-18.8,42.8 -18.405,42.8 -18.177,43.027 -18.177,43.228 -18.092,43.312 -16.299,43.312 -15.955,43.656 -15.955,44.4 -15.927,44.428 -15.927,45.013 -15.843,45.098 -15.602,45.098 R119A.1@-15.2,45.5
CFD_OUTB_N: "X4 - nowyB.5" DD1B.2 DD15B.4 R120B.1 U1B.4 | length 63.4
  Top Layer w0.145: -25.88,25.98 -26.248,25.98 -27.027,25.2 -27.027,24.527 -26.964,24.464 -17.636,24.464 -14.355,27.745 -9.499,27.745 -8.855,27.101 -8.855,25.699 -9.326,25.228 -10.472,25.228 -10.6,25.1 U1B.4@-11.25,25.1 -11.9,25.1 -12.027,25.228 -13.872,25.228 -14.56,24.54 -14.56,21.06 -14.227,20.727 -14.227,18.127 -12.9,16.8 -10.154,16.8 -9.755,16.401 -9.755,14.599 -10.12,14.233 -11.131,14.233 -11.211,14.153 -12.505,14.153 -12.586,14.233 -12.927,14.233 -13.549,14.855 -15.421,14.855 -16.029,15.463 -21.297,15.463 -21.5,15.259 -21.5,14.7 -21.357,14.557 -21.017,14.557 -20.822,14.753 v1(-20.755,14.753)
  Bottom Layer w0.145: v1(-20.755,14.753) -20.455,14.753 -20.408,14.705 -20.287,14.705 -20.202,14.79 -20.202,14.813 -19.975,15.04 DD15B.4@-19.5,15.04 -19.105,15.04 -18.877,14.813 -18.877,14.612 -18.792,14.527 -17.5,14.527 -17.028,15 -17.028,15.953 -17.475,16.4 R120B.1@-17.7,16.4
CFD_OUTB_P: "X4 - nowyB.4" DD1B.1 DD15B.3 R119B.1 U1B.3 | length 64.3
  Top Layer w0.145: -28.42,25.98 -28.052,25.98 -27.272,25.2 -27.272,24.426 -27.065,24.219 -17.535,24.219 -14.254,27.5 -9.6,27.5 -9.1,27 -9.1,25.8 -9.427,25.473 -10.472,25.473 -10.6,25.6 U1B.3@-11.25,25.6 -11.9,25.6 -12.027,25.473 -13.974,25.473 -14.805,24.641 -14.805,20.959 -14.472,20.625 -14.472,18.025 -13.001,16.555 -10.255,16.555 -10,16.3 -10,14.7 -10.222,14.478 -11.131,14.478 -11.333,14.681 DD1B.1@-11.858,14.681 -12.383,14.681 -12.586,14.478 -12.826,14.478 -13.448,15.1 -15.32,15.1 -15.928,15.708 -21.398,15.708 -21.745,15.361 -21.745,14.599 -21.459,14.312 -20.986,14.312 -20.827,14.153 v1(-20.731,14.153)
  Bottom Layer w0.145: v1(-20.731,14.153) -20.683,14.105 -20.287,14.105 -20.202,14.02 -20.202,13.997 -19.975,13.77 DD15B.3@-19.5,13.77 -19.105,13.77 -18.877,13.997 -18.877,14.198 -18.792,14.282 -17.399,14.282 -16.783,14.898 -16.783,15.942 -16.325,16.4 R119B.1@-16.1,16.4
CH_PWR_CORE_GOOD: IC3.26 IC4.19 R47.1 R48.2 TP1.1 | length 7.4
  Top Layer w0.2: TP1.1@-55.481,-62.414 -55.881,-62.814 R47.1@-55.881,-63.814 -55.691,-64.004 -55.591,-64.004 -55.091,-64.504 -55.091,-64.524 -54.901,-64.714 R48.2@-54.881,-64.714 -54.881,-65.378 -54.551,-65.707 -53.956,-65.707 -53.522,-65.274 -52.33,-65.274 -52.196,-65.139 IC3.26@-51.44,-65.139
CLKA_OUT_N1: IC6A.56 IC8A.K23 | length 56.7
  Top Layer w0.1: IC6A.56@-38.527,36.306 -38.219,36.306 -38.069,36.456 -37.6,36.456 v1(-37.4,36.256)
  Top Layer w0.145: v2(13.519,40.086) IC8A.K23@14.019,40.586
  Mid-Layer 2 w0.1: v1(-37.4,36.256) -37.321,36.256 -37.141,36.436 -13.064,36.436 -12.14,37.36 -4.585,37.36 -3.509,38.436 8.064,38.436 8.468,38.436 8.557,38.347 8.557,38.297 8.645,38.208 8.822,38.208 8.911,38.297 8.911,38.347 8.999,38.436 9.335,38.436 12.704,38.436 13.109,38.841 13.109,40.292 13.253,40.436 13.691,40.436 13.899,40.227 13.899,40.144 13.841,40.086 v2(13.519,40.086)
CLKA_OUT_N2: IC6B.56 IC8B.K23 | length 60.9
  Top Layer w0.1: IC6B.56@-38.527,6.506 -38.219,6.506 -38.069,6.656 -37.6,6.656 v1(-37.4,6.456)
  Top Layer w0.145: v2(13.519,4.194) 13.523,4.194 14.015,4.686 IC8B.K23@14.019,4.686
  Mid-Layer 2 w0.1: v1(-37.4,6.456) -37.321,6.456 -37.141,6.636 -29.075,6.636 -26.939,4.5 -7.239,4.5 -4.94,2.201 -4.94,2.135 -4.565,1.76 -4.499,1.76 -1.263,-1.477 1.525,-1.477 5.587,2.586 9.094,2.586 9.498,2.586 9.586,2.497 9.586,2.447 9.675,2.358 9.852,2.358 9.94,2.447 9.94,2.497 10.029,2.586 10.413,2.586 12.754,2.586 13.109,2.941 13.109,4.392 13.261,4.544 13.691,4.544 13.899,4.335 13.899,4.252 13.841,4.194 v2(13.519,4.194)
CLKA_OUT_P1: IC6A.57 IC8A.K22 | length 56.8
  Top Layer w0.1: IC6A.57@-38.527,36.806 -38.219,36.806 -38.069,36.656 -37.6,36.656 v1(-37.4,36.856)
  Top Layer w0.145: v2(14.519,40.086) IC8A.K22@15.019,40.586
  Mid-Layer 2 w0.1: v1(-37.4,36.856) -37.321,36.856 -37.141,36.676 -13.164,36.676 -12.239,37.6 -4.684,37.6 -3.608,38.676 12.604,38.676 12.869,38.941 12.869,40.391 13.154,40.676 13.79,40.676 14.139,40.327 14.139,40.144 14.198,40.086 v2(14.519,40.086)
CLKA_OUT_P2: IC6B.57 IC8B.K22 | length 61.1
  Top Layer w0.1: IC6B.57@-38.527,7.006 -38.219,7.006 -38.069,6.856 -37.6,6.856 v1(-37.4,7.056)
  Top Layer w0.145: v2(14.519,4.194) 14.523,4.194 15.015,4.686 IC8B.K22@15.019,4.686
  Mid-Layer 2 w0.1: v1(-37.4,7.056) -37.321,7.056 -37.141,6.876 -28.976,6.876 -26.84,4.74 -7.14,4.74 -4.7,2.3 -4.7,2.234 -4.466,2 -4.4,2 -1.163,-1.237 1.425,-1.237 5.488,2.826 9.094,2.826 10.413,2.826 12.654,2.826 12.869,3.041 12.869,4.491 13.161,4.784 13.79,4.784 14.139,4.434 14.139,4.252 14.198,4.194 v2(14.519,4.194)
CLKB_OUT_N1: IC7A.56 IC8A.AC21 | length 60.8
  Top Layer w0.1: IC7A.56@-38.527,48.356 -38.219,48.356 -38.069,48.506 -37.6,48.506 v1(-37.4,48.306)
  Top Layer w0.145: v2(15.519,54.086) IC8A.AC21@16.019,53.586
  Mid-Layer 2 w0.1: v1(-37.4,48.306) -37.321,48.306 -37.141,48.486 -36.408,48.486 -36.244,48.649 -35.617,48.649 -34.467,47.5 -28.461,47.5 -26.659,49.302 -1.528,49.302 1.756,52.586 3.552,52.586 5.432,54.466 9.531,54.466 9.935,54.466 10.023,54.377 10.023,54.3 10.112,54.212 10.289,54.212 10.377,54.3 10.377,54.377 10.466,54.466 10.643,54.466 10.731,54.377 10.731,54.34 10.82,54.251 10.997,54.251 11.085,54.34 11.085,54.377 11.174,54.466 11.393,54.466 15.723,54.466 15.911,54.278 15.911,53.698 15.852,53.639 15.635,53.639 15.577,53.698 15.577,54.028 v2(15.519,54.086)
CLKB_OUT_N2: IC7B.56 IC8B.AC21 | length 59.1
  Top Layer w0.1: IC7B.56@-38.527,18.556 -38.219,18.556 -38.069,18.706 -37.6,18.706 v1(-37.4,18.506)
  Top Layer w0.145: v2(15.519,18.186) IC8B.AC21@16.019,17.686
  Mid-Layer 2 w0.1: v1(-37.4,18.506) -37.321,18.506 -37.141,18.686 -35.125,18.686 -33.769,17.33 -25.67,17.33 -24.34,18.66 -9.47,18.66 -8.744,19.386 0.881,19.386 1.721,18.546 9.479,18.546 9.883,18.546 9.972,18.457 9.972,18.38 10.06,18.292 10.237,18.292 10.326,18.38 10.326,18.457 10.414,18.546 10.591,18.546 10.68,18.457 10.68,18.42 10.768,18.331 10.945,18.331 11.034,18.42 11.034,18.457 11.122,18.546 11.243,18.546 15.744,18.546 15.911,18.378 ; v2(15.519,18.186) 15.577,18.128 15.577,17.798 15.635,17.739 15.852,17.739 15.911,17.798 15.911,18.378 ; 15.92,18.37 15.911,18.378
CLKB_OUT_P1: IC7A.57 IC8A.AB21 | length 60.9
  Top Layer w0.1: IC7A.57@-38.527,48.856 -38.219,48.856 -38.069,48.706 -37.6,48.706 v1(-37.4,48.906)
  Top Layer w0.145: v2(15.519,53.086) IC8A.AB21@16.019,52.586
  Mid-Layer 2 w0.1: v1(-37.4,48.906) -37.321,48.906 -37.141,48.726 -36.507,48.726 -36.344,48.889 -35.517,48.889 -34.368,47.74 -28.56,47.74 -26.758,49.542 -1.627,49.542 1.657,52.826 3.453,52.826 5.333,54.706 15.823,54.706 16.151,54.378 16.151,53.599 15.952,53.399 15.618,53.399 15.559,53.341 15.559,53.126 v2(15.519,53.086)
CLKB_OUT_P2: IC7B.57 IC8B.AB21 | length 59.2
  Top Layer w0.1: IC7B.57@-38.527,19.056 -38.219,19.056 -38.069,18.906 -37.6,18.906 v1(-37.4,19.106)
  Top Layer w0.145: v2(15.519,17.186) IC8B.AB21@16.019,16.686
  Mid-Layer 2 w0.1: v1(-37.4,19.106) -37.321,19.106 -37.141,18.926 -35.026,18.926 -33.67,17.57 -25.77,17.57 -24.439,18.9 -9.569,18.9 -8.844,19.626 0.98,19.626 1.82,18.786 15.843,18.786 16.151,18.478 16.151,17.699 15.952,17.499 15.618,17.499 15.559,17.441 15.559,17.226 v2(15.519,17.186)
DA7_VINREG: C132.2 DA7.14 DA7.20 | length 17.6
  Top Layer w0.2: v1@4.993,-30.249 DA7.20@6.154,-30.249 ; DA7.14@11.654,-26.999 v1(11.654,-26.199)
  Bottom Layer w0.2: C132.2@0.954,-30.499 4.353,-30.499 4.549,-30.303 4.939,-30.303 v1(4.993,-30.249) 5.405,-29.837 5.405,-26.053 6.356,-25.102 10.557,-25.102 v1(11.654,-26.199)
DA8_VINREG: C149.2 DA8.14 DA8.20 | length 10.7
  Top Layer w0.2: v1(28.944,-30.249) DA8.20@29.994,-30.249 DA8.20@30.144,-30.249 ; v1(33.719,-27.455) 33.725,-27.455 34.181,-26.999 DA8.14@35.644,-26.999
  Bottom Layer w0.2: C149.2@27.444,-30.249 v1(28.944,-30.249) 30.925,-30.249 v1(33.719,-27.455)